# Altium PCB PCB1.PcbDoc
Units mil, origin at the board's own origin, x right, y up, seen from the top; angles counter-clockwise.
Board outline 3980 x 2430 mil, 2 copper layers (Top Layer, Bottom Layer); 78 components, 51 nets, 264 pads, 41 vias.
Unrouted connection lines stored in the file: 1.
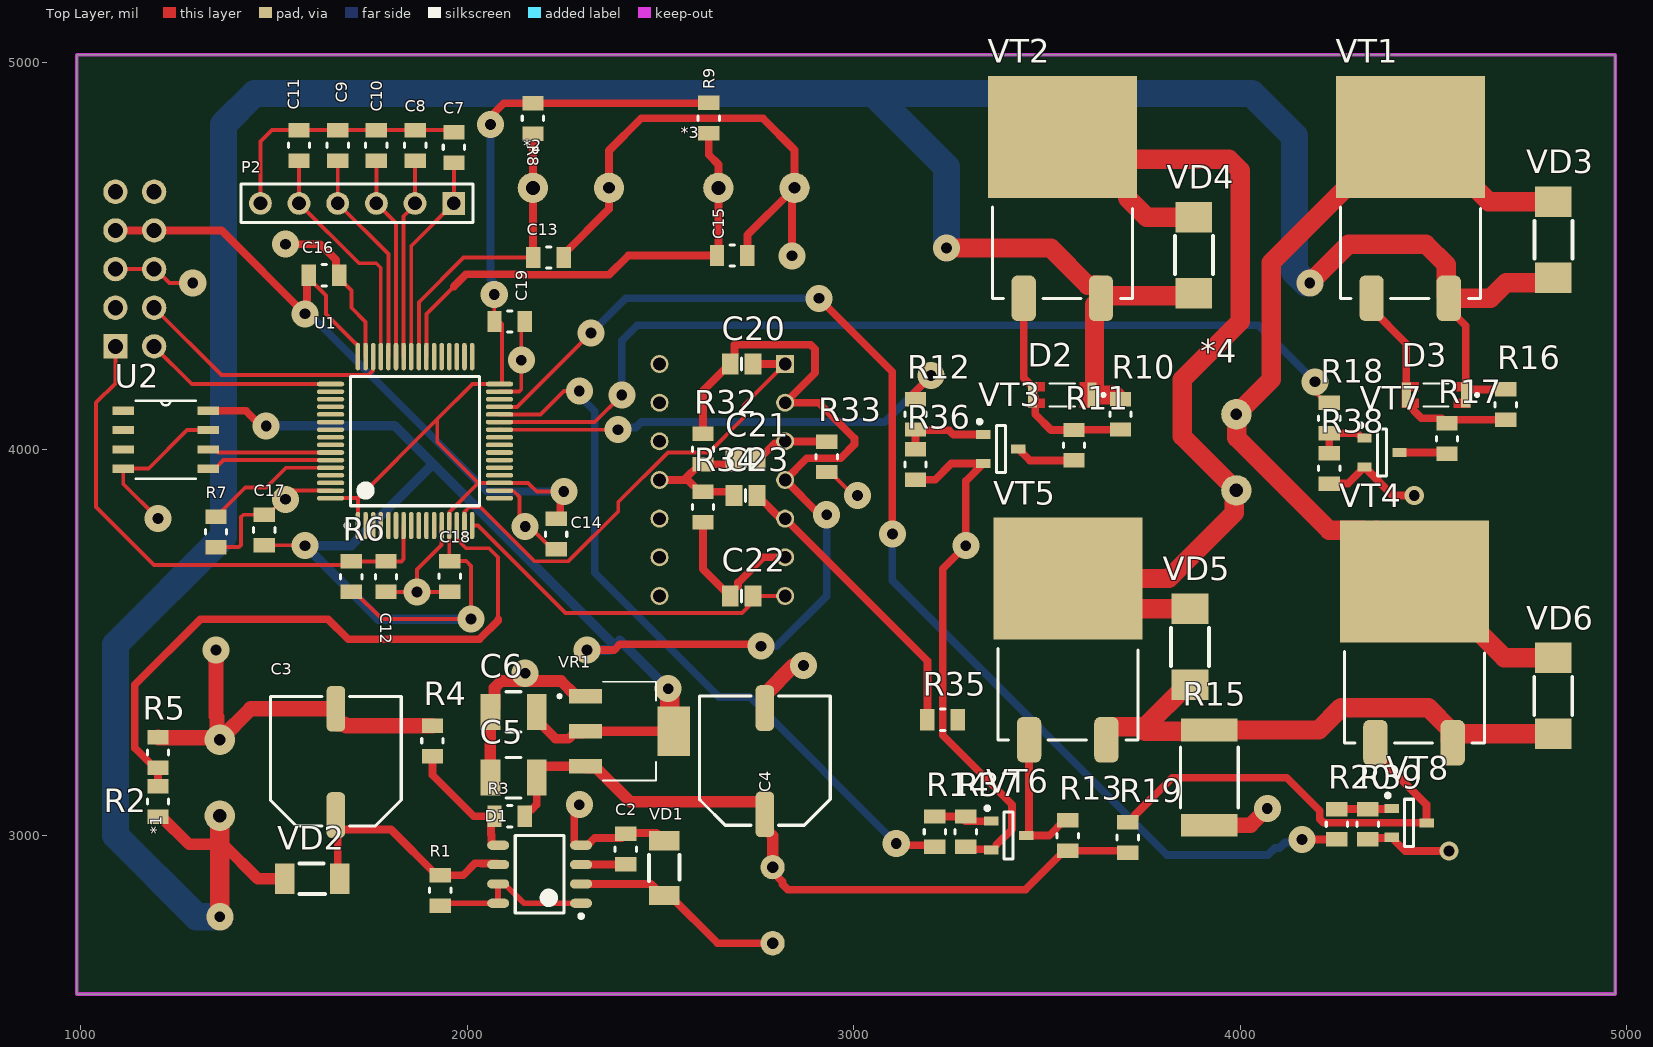
[diagram p0: Top Layer view]
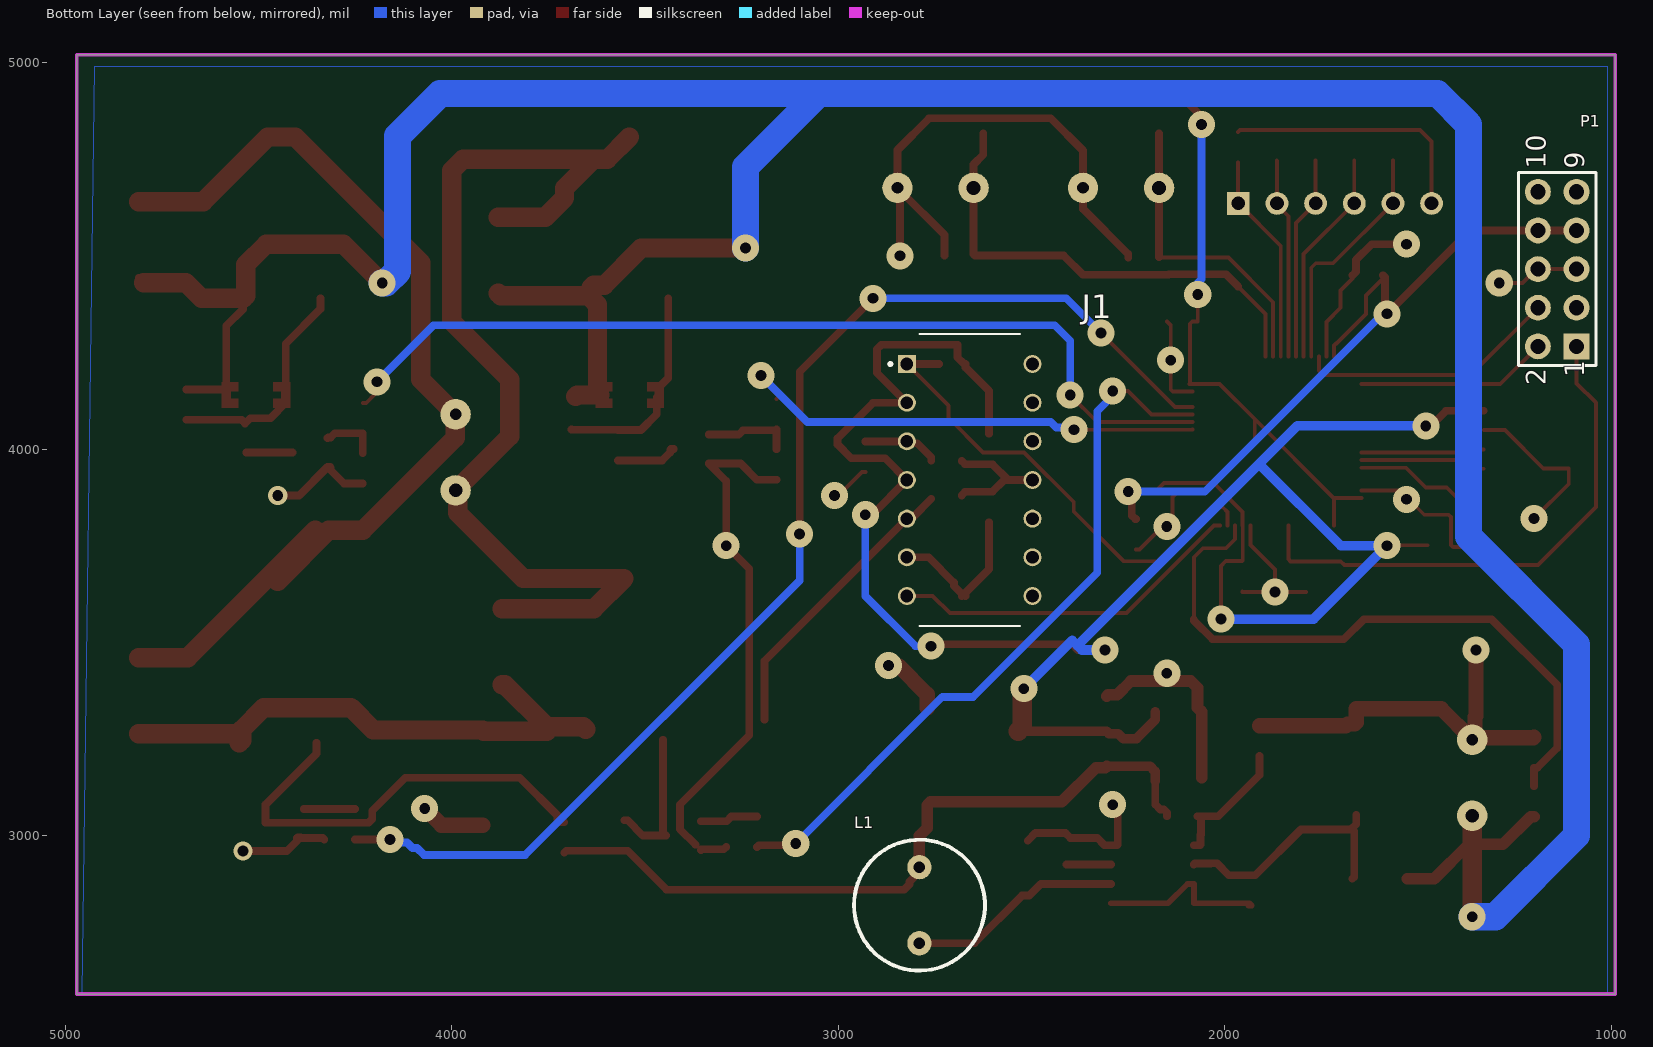
[diagram p1: Bottom Layer view, seen from below]
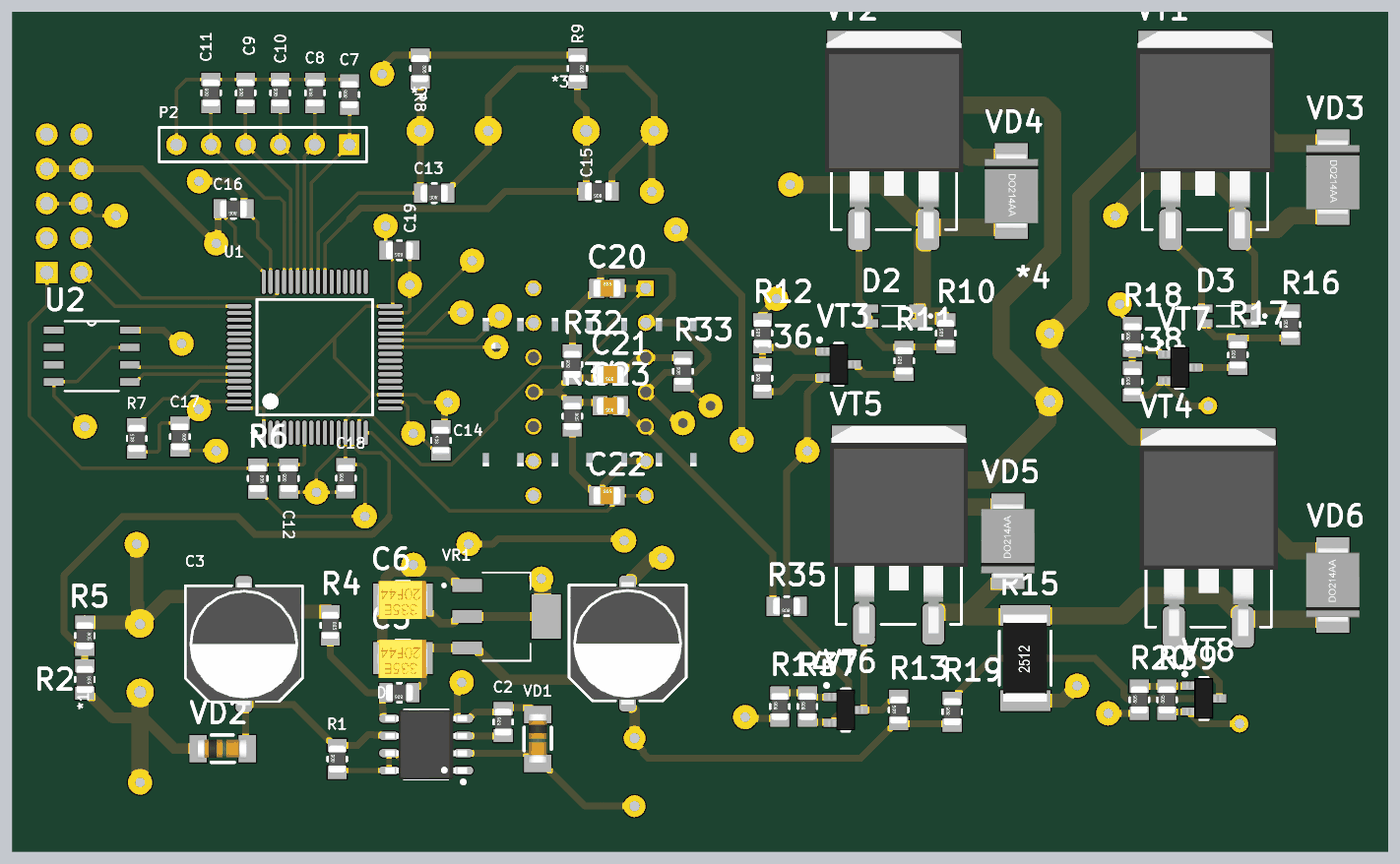
[diagram p2: 3D render of the assembled board from above, using the file's embedded part models]

## Layer stack, top to bottom
Top Solder: solder mask 0.4, Solder Resist, Dk 3.5
Top Layer: signal copper 1.4
Dielectric 1: dielectric 12.6, FR-4, Dk 4.8
Bottom Layer: signal copper 1.4
Bottom Solder: solder mask 0.4, Solder Resist, Dk 3.5

## Board outline
990,2590 990,5020 4970,5020 4970,2590

## Design rules (kind name [scope] priority, off if disabled: settings)
Clearance Clearance_1 [InPolygon] p1: gap=20 ignorepadtopadclearanceinfootprint=TRUE
Clearance [All] p2: gap=7 ignorepadtopadclearanceinfootprint=TRUE
PlaneClearance [All] p1: clearance=40
PolygonConnect [All] p1: connectstyle=Relief reliefconductorwidth=10 reliefentries=4 polygonreliefangle="90 Angle" airgapwidth=10
RoomDefinition MCU [InComponentClass('MCU')] p1: confinementstyle=ConfineIn formatcopy=TRUE lockcomponents=FALSE outline 1015,3425.63 3080.63,3425.63 3080.63,4975 1015,4975
RoomDefinition Power [InComponentClass('Power')] p2: confinementstyle=ConfineIn formatcopy=TRUE lockcomponents=FALSE outline 1115.67,2595 3200.04,2595 3200.04,3415 1115.67,3415
RoomDefinition MOTOR1 [InComponentClass('MOTOR1')] p3: confinementstyle=ConfineIn formatcopy=TRUE lockcomponents=FALSE outline 3134.68,2880 4950,2880 4950,4972.63 3134.68,4972.63
RoomDefinition Designator [InComponentClass('Designator')] p4: confinementstyle=ConfineIn formatcopy=TRUE lockcomponents=FALSE outline 3060,4350 2420,4350 2420,3547.56 3060,3547.56
RoutingVias [All] p1: holewidth=28 width=50 viastyle="Through Hole" minholewidth=28 minwidth=50 maxholewidth=28 maxwidth=50
SolderMaskExpansion [All] p1: expansion=4 istentingtop=FALSE
Width [All] p1 off: maxlimit=50 minlimit=10 preferedwidth=10 minimp=50.000000 maximp=50.000000 favimp=50.000000
29 further rules are at their usual default settings.

## Classes and differential pairs
component class MOTOR1: *4 D2 D3 R10 R11 R12 R13 R14 R15 R16 R17 R18 R19 R20 R36 R37 R38 R39 VD3 VD4 VD5 VD6 VT1 VT2 VT3 VT4 VT5 VT6 VT7 VT8
component class Designator: C20 C21 C22 C23 J1 R32 R33 R34 R35
component class Power: *1 C2 C3 C4 C5 C6 D1 L1 R1 R2 R3 R4 R5 VD1 VD2 VR1
component class MCU: *2 *3 C7 C8 C9 C10 C11 C12 C13 C14 C15 C16 C17 C18 C19 P1 P2 R6 R7 R8 R9 U1 U2

## Components (designator, comment, footprint, x,y, rotation, side; value= is the part's Value field where it differs from the comment)
*1 "Power connector 2pin" "Power connector 2 pin" 1360.04,3051.3 r180 top
*2 "Power connector 2pin" "Power connector 2 pin" 2170,4675.63 r90 top
*3 "Power connector 2pin" "Power connector 2 pin" 2650,4675.63 r90 top
*4 "Power connector 2pin" "Power connector 2 pin" 3990,3893.15 r180 top
C2 "Cap 0805" R0805 2410,2965 r90 top value={Value}
C3 "100 uF 50V" "Cap Alum 8x10.5 mm" 1660.04,3040.65 r90 top value={Value}
C4 "100 uF 50V" "Cap Alum 8x10.5 mm" 2770,3042.5 r90 top value={Value}
C5 "Cap tan_B" "Tantal type B" 2120,3150 r180 top value={Value}
C6 "Cap tan_B" "Tantal type B" 2120,3320 r180 top value={Value}
C7 "Cap 0805" R0805 1965.63,4780.63 r90 top value={Value}
C8 "Cap 0805" R0805 1865.63,4785.63 r90 top
C9 "Cap 0805" R0805 1665,4785.63 r90 top
C10 "Cap 0805" R0805 1765,4785.63 r90 top
C11 "Cap 0805" R0805 1565,4785.63 r90 top
C12 "Cap 0805" R0805 1790,3670 r90 top value={Value}
C13 "Cap 0805" R0805 2210.63,4495.63 r180 top value={Value}
C14 "Cap 0805" R0805 2230,3780 r90 top value={Value}
C15 "Cap 0805" R0805 2685.63,4500.63 r180 top value={Value}
C16 "Cap 0805" R0805 1630,4450 r180 top value={Value}
C17 "Cap 0805" R0805 1475,3790.63 r270 top value={Value}
C18 "Cap 0805" R0805 1955,3670.63 r90 top value={Value}
C19 "Cap 0805" R0805 2110,4330 r180 top value={Value}
C20 "Cap 0805" C0805 2710,4220 r0 top value={Value}
C21 "Cap 0805" C0805 2720,3970 r180 top value={Value}
C22 "Cap 0805" C0805 2710,3620 r0 top value={Value}
C23 "Cap 0805" C0805 2720,3880 r180 top value={Value}
D1 "MC34063" MC34063 2187.32,2900 r180 top
D2 "LL4148" DIO_LL4148 3539.68,4140 r180 top
D3 "LL4148" DIO_LL4148 4506.46,4140 r180 top
J1 "LM324N/NOPB" DIP825W47P254L1917H533Q14 2660,3920 r180 bottom
L1 "Coil 5mm TH" "Coil 5mm TH" 2790,2820 r270 bottom
P1 "SWD Header 5X2" HDR2X5 1140,4465.63 r90 bottom
P2 "Header 6" HDR1X6 1965,4635.63 r180 top
R1 "Res 0805" R0805 1930.04,2858.15 r90 top value={Value}
R2 "Res 0805" R0805 1200.04,3088.15 r270 top value={Value}
R3 "Res 0805" R0805 2110,3050 r180 top value={Value}
R4 "Res 0805" R0805 1910,3245 r270 top value={Value}
R5 "Res 0805" R0805 1200.04,3215 r270 top value={Value}
R6 "Res 0805" R0805 1700,3670 r270 top value={Value}
R7 "Res 0805" R0805 1350,3785.63 r90 top value={Value}
R8 "Res 0805" R0805 2170,4855.63 r270 top value={Value}
R9 "Res 0805" R0805 2625,4856.26 r270 top value={Value}
R10 "Res 0805" R0805 3690,4090 r90 top value={Value}
R11 "Res 0805" R0805 3569.68,4010 r90 top value={Value}
R12 "Res 0805" R0805 3160,4090 r90 top value={Value}
R13 "Res 0805" R0805 3553.68,3000 r90 top value={Value}
R14 "Res 0805" R0805 3210,3010 r90 top value={Value}
R15 "Res 2512" R2512 3920,3150 r90 top value={Value}
R16 "Res 0805" R0805 4686.69,4115 r90 top value={Value}
R17 "Res 0805" R0805 4534.69,4027 r90 top value={Value}
R18 "Res 0805" R0805 4230,4080 r90 top value={Value}
R19 "Res 0805" R0805 3708.68,2995 r90 top value={Value}
R20 "Res 0805" R0805 4250,3029.37 r90 top value={Value}
R32 "Res 0805" R0805 2610,4000 r90 top value={Value} (schematic designator R21)
R33 "Res 0805" R0805 2930,3980 r90 top value={Value} (schematic designator R22)
R34 "Res 0805" R0805 2610,3850 r270 top value={Value} (schematic designator R23)
R35 "Res 0805" R0805 3230,3300 r180 top value={Value} (schematic designator R24)
R36 "Res 0805" R0805 3160,3960 r90 top value={Value} (schematic designator R25)
R37 "Res 0805" R0805 3290,3010 r90 top value={Value} (schematic designator R26)
R38 "Res 0805" R0805 4230,3950 r90 top value={Value} (schematic designator R27)
R39 "Res 0805" R0805 4330,3029.37 r90 top value={Value} (schematic designator R28)
U1 "STM32F103RBT6" LQFP64_N 1865,4020.63 r90 top
U2 "M24C16-WMN6P" SOIC127P600X175-8N 1220,4024 r0 top
VD1 "1N4148" SOD-80 2509.99,2996.58 r270 top
VD2 "1N4148" SOD-80 1518.46,2888.14 r0 top
VD3 "CMR2U-01" SMB/DO-214AA 4829.69,4640 r270 top
VD4 "CMR2U-01" SMB/DO-214AA 3899.68,4600 r270 top
VD5 "CMR2U-01" SMB/DO-214AA 3850.32,3390 r90 top
VD6 "CMR2U-01" SMB/DO-214AA 4790,3263.15 r90 top
VR1 "LM1117MPX-3.3" VREG_LM1117MPX-3.3 2420,3270 r0 top
VT1 "IRF5210S" D2Pak 4239.69,4390 r0 top
VT2 "IRF5210S" D2Pak 3339.68,4390 r0 top
VT3 "2N7002" SOT-23 3380.68,4000 r180 top
VT4 "STB21NM60ND" D2Pak 4249.69,3240 r0 top
VT5 "STB21NM60ND" D2Pak 3353.68,3247.86 r0 top
VT6 "2N7002" SOT-23 3400.68,3000 r180 top
VT7 "2N7002" SOT-23 4366.69,3991 r180 top
VT8 "2N7002" SOT-23 4436.69,3033 r180 top

## Footprints (in the part's own frame and the unit in brackets; to place one, negate y for a bottom-side part, rotate by r counter-clockwise, add the part's x,y. Pads: shape width x height; smd on the part's side, far side on the other; paste and mask are expansions set on the pad)
C0805 [mm]
  rect 1.1x1.4 smd: 1(-0.75,0) 2(0.75,0)
  silkscreen extent 0,-0.4 0,0.4, body extent -1,-0.62 1,0.63, height 0.78
"Cap Alum 8x10.5 mm" [mm]
  rrect50% 3x1.2 smd: 1(0.318,0) 2(7.302,0)
  silkscreen extent -0.4,-4.3 8.1,4.3, body extent -0.69,-4.15 8.31,4.15, height 11.9
"Coil 5mm TH" [mm]
  round 1.6 / inner round 1.524 / far side round 1.6 hole 0.762: 1(-2.5,0) 2(2.5,0)
  silkscreen extent -4.3,-4.3 4.3,4.3
D2Pak [mm]
  rrect50% 1.6x3 smd: 1(2.54,0) 3(7.62,0)
  rrect0% 9.8x8 smd: 2(5.1,10.6)
  silkscreen extent 0.5,0 9.7,6, body extent 0.02,-0.7 10.18,14.56, height 4.98
DIO_LL4148 [mm]
  rect 0.6x1.65 smd: A(1.95,0) C(-1.95,0)
  Top Layer region: 2.25,-0.825 1.15,-0.825 1.15,-0.25 1.65,-0.25 1.65,0.25 1.15,0.25 1.15,0.825 2.25,0.825
  Top Layer region: -1.15,0.25 -1.65,0.25 -1.65,-0.25 -1.15,-0.25 -1.15,-0.825 -2.24,-0.825 -2.24,0.825 -1.15,0.825
  silkscreen extent -2.8,-0.75 0.83,0.75
DIP825W47P254L1917H533Q14 [mm]
  rect 1.18x1.18 hole 0.83: 1(-4.127,7.62)
  round 1.18 hole 0.83: 2(-4.127,5.08) 3(-4.127,2.54) 4(-4.127,0) 5(-4.127,-2.54) 6(-4.128,-5.08) 7(-4.128,-7.62) 8(4.127,-7.62) 9(4.127,-5.08) 10(4.127,-2.54) 11(4.127,0) 12(4.127,2.54) 13(4.128,5.08) 14(4.128,7.62)
  silkscreen extent -5.32,-9.59 3.3,9.59, body extent -9.65,-5.46 9.65,5.46, height 5.08
HDR1X6 [mm] "Connector; Header; 6 Position"
  rect 1.5x1.5 hole 0.9: 1(0,0)
  round 1.5 hole 0.9: 2(2.54,0) 3(5.08,0) 4(7.62,0) 5(10.16,0) 6(12.7,0)
  silkscreen extent -1.27,-1.27 13.97,1.27
HDR2X5 [mm] "Connector; Header; 5x2 Position"
  rect 1.7x1.7 / inner rect 1.5x1.5 / far side rect 1.6x1.6 hole 1: 1(-5.08,-1.27)
  round 1.7 / inner round 1.5 / far side round 1.6 hole 1: 2(-5.08,1.27) 3(-2.54,-1.27) 4(-2.54,1.27) 5(0,-1.27) 6(0,1.27) 7(2.54,-1.27) 8(2.54,1.27) 9(5.08,-1.27) 10(5.08,1.27)
  silkscreen extent -6.35,-2.54 6.35,2.54
LQFP64_N [mm] "Thin QFP, 64-Leads, Body 10x10mm, Pitch 0.5mm, IPC Medium Density"
  oval 1.8x0.3 smd: 1(-5.55,3.75) 2(-5.55,3.25) 3(-5.55,2.75) 4(-5.55,2.25) 5(-5.55,1.75) 6(-5.55,1.25) 7(-5.55,0.75) 8(-5.55,0.25) 9(-5.55,-0.25) 10(-5.55,-0.75) 11(-5.55,-1.25) 12(-5.55,-1.75) 13(-5.55,-2.25) 14(-5.55,-2.75) 15(-5.55,-3.25) 16(-5.55,-3.75) 33(5.55,-3.75) 34(5.55,-3.25) 35(5.55,-2.75) 36(5.55,-2.25) 37(5.55,-1.75) 38(5.55,-1.25) 39(5.55,-0.75) 40(5.55,-0.25) 41(5.55,0.25) 42(5.55,0.75) 43(5.55,1.25) 44(5.55,1.75) 45(5.55,2.25) 46(5.55,2.75) 47(5.55,3.25) 48(5.55,3.75)
  oval 0.3x1.8 smd: 17(-3.75,-5.55) 18(-3.25,-5.55) 19(-2.75,-5.55) 20(-2.25,-5.55) 21(-1.75,-5.55) 22(-1.25,-5.55) 23(-0.75,-5.55) 24(-0.25,-5.55) 25(0.25,-5.55) 26(0.75,-5.55) 27(1.25,-5.55) 28(1.75,-5.55) 29(2.25,-5.55) 30(2.75,-5.55) 31(3.25,-5.55) 32(3.75,-5.55) 49(3.75,5.55) 50(3.25,5.55) 51(2.75,5.55) 52(2.25,5.55) 53(1.75,5.55) 54(1.25,5.55) 55(0.75,5.55) 56(0.25,5.55) 57(-0.25,5.55) 58(-0.75,5.55) 59(-1.25,5.55) 60(-1.75,5.55) 61(-2.25,5.55) 62(-2.75,5.55) 63(-3.25,5.55) 64(-3.75,5.55)
  silkscreen extent -5.67,-4.25 4.25,4.57, body extent -5,-5 5,5, height 1.6
MC34063 [mm] "MC34063 SO-8"
  oval 1.45x0.6 smd: 1(-2.725,1.905) 2(-2.725,0.635) 3(-2.725,-0.635) 4(-2.725,-1.905) 5(2.725,-1.905) 6(2.725,-0.635) 7(2.725,0.635) 8(2.725,1.905)
  silkscreen extent -2.85,-2.55 1.6,2.88, body extent -3,-2.55 3,2.55, height 1.75
"Power connector 2 pin" [mm]
  round 2 hole 0.9: 1(0,0)
  round 2 hole 0.762: 2(0,-5)
R0805 [mm]
  rect 0.95x1.4 smd: 1(-1,0) 2(1,0)
  silkscreen extent -0.15,-0.7 0.15,0.7, body extent -1,-0.62 1,0.63, height 0.78
R2512 [mm]
  rect 1.5x3.7 smd: 1(-3.125,0) 2(3.125,0)
  silkscreen extent -2,-1.9 2,1.9, body extent -3.2,-1.6 3.2,1.6, height 0.6
SMB/DO-214AA [mm]
  rect 2x2.4 smd: 1(0,-0.5) 2(5,-0.5)
  silkscreen extent 1.25,-1.75 3.75,0.75, body extent -0.29,-2.47 5.29,1.48, height 2.65
SOD-80 [mm]
  rect 1.27x2 smd: 1(0.25,0) 2(3.85,0)
  silkscreen extent 1.2,-1 2.9,1, body extent 0.2,-0.75 3.8,0.75, height 1.5
SOIC127P600X175-8N [mil]
  rect 56x21 smd: 1(-110,75) 2(-110,25) 3(-110,-25) 4(-110,-75) 5(110,-75) 6(110,-25) 7(110,25) 8(110,75)
  silkscreen extent -78,-101 78,101
SOT-23 [mm]
  rect 0.95x0.6 smd: 1(1.15,-0.95) 2(1.15,0.95) 3(-1.15,0)
  silkscreen extent -0.3,-1.92 1.52,1.55, body extent -1.27,-1.5 1.27,1.5, height 1.1
"Tantal type B" [mm]
  rect 1.3x2.35 smd: 1(-1.525,0) 2(1.525,0)
  silkscreen extent -0.5,-1.33 0.5,1.33, body extent -1.81,-1.35 1.86,1.45, height 1.9
VREG_LM1117MPX-3.3 [mm]
  rect 2.15x0.95 smd: 1(-2.9,2.3) 2(-2.9,0) 3(-2.9,-2.3)
  rect 2.15x3.25 smd: 4(2.9,0)
  silkscreen extent -4.7,-3.25 1.75,3.25

## Part data
C2 C7 C8 C9 C10 C11 C12 C13 C14 C15 C16 C17 C18 C19 C20 C21 C22 C23: "Конденсатор 0805", Manufacturer=Murata, Model=0805, sm_pins=2, th_pins=0
C3 C4: library part "Cap Alum", "SMT 8 x 10.5 мм", Manufacturer=Epcos
C5 C6: "type B", Manufacturer=AVX
D2 D3: "Diode Standard 100V 200mA Surface Mount SOD-80", Package="SOD-80 Taitron", Availability=Unavailable, MF="ON Semiconductor", MP=LL4148, Price=None, SnapEDA_Link=https://www.snapeda.com/parts/LL4148/ON%20Semiconductor/view-part/2182678/?ref=snap
J1: "4-Channel industry standard operational amplifier 14-PDIP 0 to 70", Package="PDIP-14 Texas Instruments", Availability=Good, Check_prices=https://www.snapeda.com/parts/LM324N/Texas%20Instruments/view-part/295/?ref=eda, MF="Texas Instruments", MP=LM324N, Price=None, Purchase-URL=https://pricing.snapeda.com/search/part/LM324N/?ref=eda, SnapEDA_Link=https://www.snapeda.com/parts/LM324N/Texas%20Instruments/view-part/295/?ref=snap
P1: "Header, 5-Pin, Dual row", LatestRevisionDate=17-Jul-2002, LatestRevisionNote="Re-released for DXP Platform.", Publisher="Altium Limited"
P2: "Header, 6-Pin", LatestRevisionDate=17-Jul-2002, LatestRevisionNote="Re-released for DXP Platform.", Publisher="Altium Limited"
R1 R2 R3 R4 R5 R6 R7 R8 R9 R10 R11 R12 R13 R14 R16 R17 R18 R19 R20 R32 R33 R34 R35 R36 R37 R38 R39: "Резистор 0805", Manufacturer=Yageo, sm_pins=2, th_pins=0
R15: "Резистор 2512", Manufacturer=Yageo, Model=2512, sm_pins=2, th_pins=0
U1: "STM32 ARM-based 32-bit MCU with 128 Kbytes Flash, 64-pin LQFP, Industrial Temperature", ComponentLink1Description="Manufacturer Link", ComponentLink1URL=www.st.com/stm32, ComponentLink2Description=Datasheet, ComponentLink2URL=http://www.st.com/stonline/products/literature/ds/13587.pdf, DatasheetVersion="rev6, Mar-2008", PackageDescription="64-Pin Low-Profile Quad Flat Pack, 10 x 10 mm Body, 0.5 mm Pitch (LQFP64)", PackageReference=LQFP64, PackageVersion=Mar-2008, Published=30-May-2008, Publisher="Altium Limited"
U2: "EEPROM Memory IC 16Kb _2K x 8_ IÂ²C 400kHz 900ns 8-SO", Package="SO-8 STMicroelectronics", Availability=Unavailable, MF=STMicroelectronics, MP=M24C16-WMN6P, Price=None, SnapEDA_Link=https://www.snapeda.com/parts/M24C16-WMN6P/STMicroelectronics/view-part/42148/?ref=snap
VD1 VD2: "4 ns, 100V, 150 mA", Manufacturer=NXP, Model=1N4148
VD3 VD4 VD5 VD6: "Ultrafast, 100V, 2A, 50 ns", Manufacturer="Central Semiconductor Corp", Model=CMR2U-01
VR1: "800-mA 15-V linear voltage regulator 4-SOT-223", Package="SOT-223-4 Texas Instruments", Availability=Warning, Check_prices=https://www.snapeda.com/parts/LM1117MPX-3.3/Texas%20Instruments/view-part/78946/?ref=eda, MF="Texas Instruments", Mouser-Purchase-URL=https://snapeda.com/shop?store=Mouser&id=78946, MP=LM1117MPX-3.3, Price=None, SnapEDA_Link=https://www.snapeda.com/parts/LM1117MPX-3.3/Texas%20Instruments/view-part/78946/?ref=snap, Texas_Instruments-Purchase-URL=https://snapeda.com/shop?store=Texas+Instruments&id=78946
VT1 VT2: "P-chanel, 100V, 40A, 60 mOhm", Manufacturer="International Rectifier", Model=IRF5210SPBF
VT3 VT6 VT7 VT8: "60V, 200 mA, N-chanel", Manufacturer="ON Semiconductor", Model=2N7002LT1G, sm_pins=3, th_pins=0
VT4 VT5: "D2pak, 600V, 17А, 170 mOhm", Manufacturer="ST Microelectronics", Model=STB21NM60ND

## Via types
v1: diameter 70, hole 28, Top Layer to Bottom Layer, 39 vias
v2: diameter 50, hole 28, Top Layer to Bottom Layer, 2 vias

## Nets (pads, with @x,y where several pads share a name; then routed paths per layer and width w, separated by ;. In a path a pad name is that pad's centre, name@x,y a point inside that pad or via, vN(x,y) a via of type N, cw(c..) or ccw(c..) an arc to the next point about the centre after c; other vN are vias at no path point)
BUTTON_1: C7.1 P2.1 U1.41 | length 547.9
  Top Layer w10: U1.41 1855.16,4525.79 P2.1 1965.63,4636.26 C7.1
BUTTON_2: C8.1 P2.2 U1.42 | length 519.6
  Top Layer w10: U1.42 1835.47,4602.19 1865,4631.71 P2.2 1865,4745.63 C8.1
BUTTON_3: C10.1 P2.3 U1.43 | length 528.2
  Top Layer w10: C10.1 P2.3 1815.79,4584.84 U1.43
BUTTON_4: C9.1 P2.4 U1.44 | length 561.4
  Top Layer w10: C9.1 P2.4 1796.1,4504.53 U1.44
BUTTON_5: C11.1 P2.5 U1.45 | length 620.9
  Top Layer w10: C11.1 P2.5 1720,4480.63 1764.77,4480.63 1776.42,4468.98 U1.45
EEPROM_SCL: U1.58 U2.6 | length 319.8
  Top Layer w10: U2.6 1347.5,3999 1355.4,3991.1 U1.58
EEPROM_SDA: U1.59 U2.5 | length 325.8
  Top Layer w10: U2.5 1347.5,3949 1369.92,3971.42 U1.59
GND: *1.2 *2.2 *3.2 C2.2 C3.2 C4.2 C5.2 C6.2 C7.2 C8.2 C9.2 C10.2 C11.2 C12.1 C13.1 C14.1 C15.1 C16.1 C17.1 C18.1 C19.1 C21.2 C23.2 D1.4 J1.11 P1.5 P1.6 P2.6 R4.1 R5.1 R7.1 R15.1 R32.1 R34.1 R36.1 R37.1 R38.1 R39.1 U1.12 U1.18 U1.31 U1.47 U1.63 U2.4 U2.7 VD1.1 VR1.1 VT3.2 VT6.2 VT7.2 VT8.2 | length 8815.1
  Top Layer w10: P1.5 P1.6 1194.37,4465.63 1230,4430 v1(1290,4430) ; v1(1200,3820) 1110,3910 U2.4 1111,3950 1176,3950 1275,4049 U2.7 ; R7.1@1327.44,3732.56 1341.14,3746.26 R7.1 1409.14,3746.26 1415,3752.12 1415,3824.14 1420.86,3830 C17.1 1483.86,3830 1546.54,3892.68 U1.63 ; P2.6 1465.63,4636.26 1465.63,4795.63 1495,4825 C11.2 C9.2 C10.2 C8.2 1960.63,4825 C7.2 ; C16.1 1669.37,4441.14 1700.51,4410 1700.51,4365.72 1737.05,4329.19 U1.47 ; C12.1 1790.63,3630 v1(1870,3630) ; U1.12 1933.55,3801.78 1933.55,3751.78 1870,3688.23 v1(1870,3630) ; C18.1 1953.74,3630 v1(1870,3630) ; U1.18 2113.52,3892.68 2115.3,3890.9 2120.45,3890.9 2134.97,3876.38 2134.97,3826.8 2221.14,3740.63 C14.1 ; U1.31 2083.85,4148.93 2134.14,4148.93 2140,4154.79 v1(2140,4230) 2140,4320.63 C19.1
  Top Layer w20: v1(1530,4530) 1620,4530 1660.67,4489.33 1660.67,4458.7 C16.1 ; C13.1 2250,4504.49 2366.77,4621.26 2366.77,4675.55 *2.2 2366.85,4772.48 2450,4855.63 2765,4855.63 2846.85,4773.78 *3.2 *3.2@2840,4668.78 ; v1(2290,3080) 2290,3076.47 2277.18,3063.65 2277.18,2976.44 2278.62,2975 D1.4 2311.34,2975 2330.3,2993.96 2399.59,2993.96 C2.2 2412.36,3006.73 2490,3006.73 VD1.1 ; J1.11 2560.51,3920 ; C23.2@2680.63,3880 2680.63,3880.67 2671.93,3889.37 R34.1 2601.14,3889.37 2570.51,3920 2560.51,3920 ; C21.2@2680.63,3970 2680.63,3969.33 2671.93,3960.63 R32.1 2601.14,3960.63 2560.51,3920 ; C15.1 2725,4553.78 *3.2@2840,4668.78 ; v1(2840,4500) *3.2@2840,4668.78 ; R36.1 3210.63,3920.63 3252.6,3962.6 VT3.2 3290,3917.19 v1(3290,3750) 3230,3690 3230,3259.68 3409.68,3080 3409.68,3016.87 3369.11,2976.3 ; R37.1 3296.22,2964.41 3353.6,2964.41 VT6.2 ; R38.1 4278.44,3910.63 4312.71,3944.9 4312.71,3951.79 4314.52,3953.6 VT7.2 4395.01,3880 v2(4450,3880) ; R39.1 4333.79,2993.79 4389.6,2993.79 VT8.2 4398.3,2995.6 4400.11,2993.79 4400.11,2986.9 4427.01,2960 v2(4540,2960)
  Top Layer w30: C5.2 C6.2 2070.55,3330.59 2070.55,3382.43 2088.12,3400 2150,3400 2242.76,3400 2278.5,3364.25 2302.13,3364.25 VR1.1
  Top Layer w39.37: R5.1 1201.02,3253.39 *1.2@1354.8,3253.39 ; v1(1350,3480) 1350,3309.63 1352.51,3307.13 1352.51,3255.68 *1.2@1354.8,3253.39 ; R4.1 1687.04,3284.37 1682.63,3288.78 1663.98,3288.78 1660.04,3292.72 C3.2 1440.04,3328.15 *1.2 *1.2@1354.8,3253.39 ; C4.2 2770,3365.43 2844.57,3440 v1(2870,3440) ; R15.1 4026.97,3026.97 v1(4070,3070)
  other v1: 2150,3420 2150,3800 1530,3870
Net*2_1: *2.1 C13.2 R8.2 U1.40 | length 806.2
  Top Layer w10: U1.40 1874.84,4379.84 1990.63,4495.63 C13.2 C13.2@2170,4496.89
  Top Layer w20: C13.2@2170,4496.89 *2.1 R8.2
Net*3_1: *3.1 C15.2 R9.2 U1.39 | length 1253.6
  Top Layer w10: U1.39 1894.53,4349.53 1965.63,4420.63
  Top Layer w20: 1965.63,4420.63 1997,4452 2144.59,4452 2145.52,4451.07 2366.76,4451.07 2416.32,4500.63 C15.2 2650,4504.37 *3.1 2650,4736.21 2625,4761.21 R9.2
Net*4_1: *4.1 VD4.1 VD5.2 VT2.2 VT5.2 | length 2671.4
  Top Layer w50: VT2.2 3597.8,4750 VT2.2@3633.23,4750 ; VD5.2 3632.8,3586.85 VT5.2 3815.18,3665.18 3984.5,3834.5 3984.5,3898.65 3850,4033.15 3850,4180 4000,4330 4000,4720.71 3970.71,4750 VT2.2@3633.23,4750 ; VD4.1 3757.76,4600 3708.39,4649.37 3708.39,4674.84 VT2.2@3633.23,4750
Net*4_2: *4.2 VD3.1 VD6.2 VT1.2 VT4.2 | length 2631.2
  Top Layer w50: VT4.2@4353.43,3789.8 4683.23,3460 VD6.2 ; VT4.2 4317.99,3789.8 4230.2,3789.8 3990.87,4029.13 3990.87,4089.13 *4.2 4080,4180 4080,4482.28 4405.04,4807.32 VT1.2 4475.91,4807.32 4643.23,4640 VD3.1
NetC2_1: C2.1 D1.3 | length 115.7
  Top Layer w10: C2.1@2409.37,2925 C2.1
  Top Layer w20: D1.3 C2.1@2409.37,2925
NetC3_1: C3.1 D1.6 R1.2 VD2.2 | length 653.1
  Top Layer w20: C3.1 1660.04,3029.39 1673.52,3015.91 1802.8,3015.91 R1.2@1921.18,2897.52 ; VD2.2 1665.04,2893.15 1665.04,3010.91 C3.1@1670.04,3015.91 ; R1.2 R1.2@1921.18,2897.52 ; D1.6 2077.43,2927.61 2037.01,2927.61 2036.47,2928.15 2020.04,2928.15 1989.41,2897.52 R1.2@1921.18,2897.52
NetC20_2: C20.2 J1.1 U1.15 | length 1254.9
  Top Layer w10: U1.15 1993.3,3802.47 1993.3,3837.64 2005.22,3849.56 2033.97,3849.56 2173.6,3709.93 2262.53,3709.93 2390.77,3838.17 2390.77,3863.09 2519.01,3991.33 2625.19,3991.33 2714.73,4080.87 2714.73,4112.23 J1.1
  Top Layer w20: C20.2 J1.1
NetC21_1: C21.1 J1.3 R33.2 | length 194.9
  Top Layer w20: C21.1@2759.37,3970 2759.37,3978.86 2795.45,4014.94 2822.5,4014.94 J1.3 ; J1.3@2827.25,4019.68 2929.69,4019.68 R33.2
NetC22_1: C22.1 J1.6 R34.2 | length 407.5
  Top Layer w20: R34.2 2610,3689.49 2670.63,3628.86 2670.63,3625.91 C22.1@2670.63,3620 ; C22.1 2680.47,3625.91 2700.87,3646.31 2700.87,3654.6 2766.27,3720 J1.6
NetC22_2: C22.2 J1.7 U1.16 | length 922.2
  Top Layer w10: U1.16 2027.87,3802.13 2066.44,3763.56 2254.56,3575.44 2711.28,3575.44 2755.84,3620 J1.7
NetC23_1: C23.1 J1.5 R35.2 | length 748.4
  Top Layer w20: C23.1@2759.37,3871.14 2805.45,3825.06 2817.44,3825.06 J1.5 ; J1.5@2830.39,3814.85 2830.39,3812.11 3190.63,3451.87 R35.2
NetD1_1: D1.1 D1.7 D1.8 R1.1 | length 446.7
  Top Layer w15: R1.1@1938.9,2818.78 R1.1 1936.26,2825 D1.8 D1.7 2096.77,2875 2146.77,2825 D1.1
NetD1_2: D1.2 L1.2 VD1.2 | length 558.9
  Top Layer w20: D1.2 2475.63,2875 2505.63,2845 2524.37,2845 2647.8,2721.57 L1.2
NetD1_5: D1.5 R3.2 R4.2 | length 345.5
  Top Layer w20: R4.2 1910,3156.93 2016.93,3050 R3.2@2061.52,3050 ; R3.2 R3.2@2061.52,3050 ; D1.5 2064.29,2975 2062.61,2976.67 2062.61,3001.34 2061.52,3002.44 R3.2@2061.52,3050
NetD2_A: D2.A R10.1 R11.2 VT2.1 | length 550.1
  Top Layer w20: VT2.1 3439.68,4183.9 3462.91,4160.67 D2.A 3469.68,4133.23 3469.68,4090 3510.31,4049.37 R11.2 3570.31,4050 3689.37,4050 R10.1
NetD3_A: D3.A R16.1 R17.2 VT1.1 | length 590.7
  Top Layer w20: VT1.1 4339.69,4362.44 4429.69,4272.44 4429.69,4119.33 4468.94,4080.07 4520.98,4080.07 R17.2 4543.94,4075.63 R16.1
NetR2_1: R2.1 R5.2 U1.14 | length 1669.5
  Top Layer w10: U1.14 1973.61,3801.78 1973.61,3766.61 1996.92,3743.31 2056.69,3743.31 2080,3720 2080,3560
  Top Layer w20: R2.1 R5.2 1191.18,3175.63 1140,3226.81 1140,3390 1310,3560 1640,3560 1692,3508 2031.54,3508 2080,3556.46 2080,3560
NetR7_2: R7.2 U1.60 | length 349
  Top Layer w10: R7.2 1425.63,3900.63 1480,3900.63 1531.1,3951.73 U1.60
NetR11_1: R11.1 VT3.3 | length 159.9
  Top Layer w20: VT3.3 3432.85,4000 3434.66,3998.19 3434.66,3991.3 3455.33,3970.63 R11.1
NetR12_1: R12.1 R36.2 VT3.1 | length 234.4
  Top Layer w10: R12.1 3161.61,4049.02 R12.1@3163.23,4047.4
  Top Layer w20: R36.2 R12.1 ; R12.1@3161.61,4049.02 3246.33,4049.02 3257.94,4037.4 VT3.1
NetR12_2: R12.2 U1.26 | length 1259.7
  Top Layer w10: U1.26 2083.58,4050.08 v1(2389.92,4050.08) ; R12.2@3150.32,4139.06 R12.2
  Top Layer w20: R12.2@3150.32,4139.06 3200,4188.74 v1(3200,4190)
  Bottom Layer w20: v1(2389.92,4050.08) 2395.69,4055.85 2436.07,4055.85 2450.23,4070 3080,4070 v1(3200,4190)
NetR13_2: R13.2 VT5.1 VT6.3 | length 374.7
  Top Layer w20: VT6.3 VT6.3@3446.87,3000 ; VT5.1 3453.68,3006.81 VT6.3@3446.87,3000 ; R13.2 3544.83,3039.37 3505.46,3000 VT6.3@3446.87,3000
NetR14_1: R14.1 U1.28 | length 1891.9
  Top Layer w10: U1.28 2189.53,4089.53 2250,4150 v1(2290,4150)
  Top Layer w20: v1(3110,2979.37) 3114.37,2975 3205.63,2975 R14.1
  Bottom Layer w20: v1(2290,4150) 2290,4138.08 2330,4098.08 2330,3680 2651.14,3358.86 2730.51,3358.86 v1(3110,2979.37)
NetR14_2: R14.2 R37.2 VT6.1 | length 150.4
  Top Layer w20: R14.2 3276.8,3049.37 3288.77,3037.4 VT6.1
NetR15_2: R15.2 VD5.1 VD6.1 VT4.3 VT5.3 | length 1391.3
  Top Layer w50: VT5.3@3653.68,3275.42 3660.18,3281.91 3754.04,3281.91 3862.13,3390 VD5.1 ; 3754.04,3270 3916.97,3270 R15.2 ; R15.2@3930,3273.03 4203,3273.03 4261.02,3331.06 4486.19,3331.06 4543.19,3274.06 4543.19,3246.5 VT4.3 ; VT4.3@4549.69,3256.65 4556.18,3263.15 VD6.1
NetR17_1: R17.1 VT7.3 | length 124.1
  Top Layer w10: R17.1@4531.31,3991 R17.1
  Top Layer w20: VT7.3 R17.1@4531.31,3991
NetR18_1: R18.1 R38.2 VT7.1 | length 147.7
  Top Layer w20: R38.2 R18.1 4302.29,4040.63 4312.71,4030.21 4319.6,4030.21 VT7.1
NetR18_2: R18.2 U1.27 | length 2430.9
  Top Layer w10: U1.27 2329.84,4069.84 v1(2400,4140) ; v1(4193.31,4174) 4197.12,4170.19 4197.12,4143.39 4221.14,4119.37 R18.2
  Bottom Layer w20: v1(2400,4140) 2400,4280 2440,4320 4047.32,4320 v1(4193.31,4174)
NetR19_2: R19.2 VT4.1 VT8.3 | length 1149.2
  Top Layer w20: R19.2 3717.54,3034.37 3726.24,3043.07 3726.24,3051.93 3824.31,3150 4120,3150 4205.44,3064.56 4205.44,3043 4215.4,3033.04 4236.96,3033.04 4237,3033 VT8.3 4481.96,3080.17 4349.69,3212.44 VT4.1
NetR20_1: R20.1 U1.29 | length 3212.2
  Top Layer w10: U1.29 2129.21,4109.21 v1(2320,4300)
  Top Layer w20: v1(2910,4390) 3100,4200 v1(3100,3780) ; v1(4160,2990) R20.1
  Bottom Layer w20: v1(2320,4300) 2410,4390 v1(2910,4390) ; v1(3100,3780) 3100,3660 3810,2950 4071.88,2950 4089.88,2968 4101.54,2968 4115.81,2982.27 4152.27,2982.27 v1(4160,2990)
NetR20_2: R20.2 R39.2 VT8.1 | length 186.6
  Top Layer w20: R20.2 R39.2 ; R39.2 4382.71,3068.74 4382.71,3069.57 4330.83,3069.57 R39.2
NetR33_1: R33.1 | length 105.1
  Top Layer w10: R33.1 2938.86,3940.63 2999.49,3880 v1(3010,3880)
NetR35_1: R35.1
NetU1_20: U1.20
NetU1_21: U1.21
NetU1_22: U1.22
NetU1_23: U1.23
RST: C12.2 P1.1 R6.1 U1.7 | length 1387.2
  Top Layer w10: P1.1 1090,4170 1040,4120 1040,3850 1190,3700 1690.63,3700 R6.1 C12.2 1829.61,3709.37 1835.47,3715.23 U1.7
SWCLK: P1.2 U1.49 | length 496.8
  Top Layer w10: P1.2 1287.36,4168.27 U1.49
SWDIO: P1.4 U1.46 | length 679
  Top Layer w10: P1.4 1363.93,4191.7 1744.46,4191.7 1756.39,4203.62 1756.39,4238.79 U1.46
VCC_36V: *1.1 D2.C D3.C R2.2 R10.2 R16.2 VD2.1 VD3.2 VD4.2 VT1.3 VT2.3 | length 8996.1
  Top Layer w0: R10.2@3679.16,4131.35 3688.02,4131.35 R10.2
  Top Layer w20: R10.2@3679.16,4131.35 R10.2@3679.16,4136.07 ; VT1.3 4539.69,4362.44 4583.23,4318.9 D3.C@4583.23,4147.56 ; D3.C D3.C@4583.23,4147.56 ; R16.2 4590.04,4154.37 D3.C@4583.23,4147.56 ; VD3.2@4797.03,4430.18 VD3.2
  Top Layer w30: R2.2 1208.9,3048.78 1280.58,2977.09 1360,2977.09 ; *1.1 1369.37,3041.97 1369.37,2977.09 1458.31,2888.15 VD2.1
  Top Layer w50: v1(1360,2790) 1360,2977.09 *1.1 *1.1 ; v1(3240,4520) 3509.68,4520 3605.63,4424.06 3633.19,4424.06 3639.68,4417.56 VT2.3@3639.68,4390.08 ; R10.2@3679.16,4136.07 3675.23,4140 D2.C 3622.7,4146.24 3622.7,4373.01 VT2.3 VT2.3@3639.68,4390.08 ; VD4.2 3873.43,4396.57 3646.18,4396.57 VT2.3@3639.68,4390.08 ; v1(4180,4430) 4280,4530 4480,4530 4533.19,4476.81 4533.19,4396.5 VT1.3 4647.58,4390 4687.76,4430.18 VD3.2@4797.03,4430.18
  Bottom Layer w70: v1(1360,2790) 1300,2790 1090,3000 1090,3494.29 1370,3774.29 1370,4840 1450,4920 3050,4920 ; v1(3240,4520) 3240,4730 3050,4920 ; v1(4180,4430) 4170,4430 4140,4460 4140,4810 4030,4920 3050,4920
VDD_3_3V: C6.1 C14.2 C16.2 C17.2 C18.2 C19.2 C20.1 J1.2 J1.4 P1.7 P1.8 R6.2 R8.1 R9.1 R32.2 U1.1 U1.13 U1.19 U1.32 U1.48 U1.64 U2.8 VR1.2 VR1.4 | length 10294
  Top Layer w10: C17.2 v1@1580,3751.26 ; C16.2 1590.63,4441.14 1634.33,4397.44 1634.33,4349.2 1710.53,4273 1712.53,4273 1717.36,4268.17 U1.48 ; U1.64 1716.73,3872.99 1717.36,3872.36 ; R6.2 1708.86,3630.63 1779.49,3560 v1(2010,3560) 2010,3697.56 1997.56,3710 C18.2 1953.58,3711.42 U1.13 1953.93,3802.47 1953.93,3837.64 2028.65,3912.36 ; U1.1 1717.36,3872.36 ; v1(2070,4400) 2070,4330.63 C19.2 2084.33,4330 2090.19,4324.14 2090.19,4169.1 2091.03,4168.27 U1.32 2013.27,4168.27 1922.5,4077.5 ; v1(2250,3890) 2180,3890 2157.64,3912.36 U1.19 2028.65,3912.36 ; R9.1@2624.37,4895 R9.1 ; 1717.36,3872.36 1922.5,4077.5 ; 1922.5,4077.5 1922.5,4018.52 2028.65,3912.36
  Top Layer w20: P1.7 P1.8 1364.37,4565.63 v1(1580,4350) 1585.32,4355.31 1585.32,4444.69 C16.2 ; U2.8 1427.47,4099 1466.47,4060 v1(1480,4060) ; v1(2060,4840) 2060,4860 2095,4895 R8.1 R9.1@2624.37,4895 ; C14.2 2231.73,3819.37 2240.43,3828.07 2240.43,3880.43 v1(2250,3890) ; v1(2310,3480) 2380,3480 2395,3495 2755,3495 v1(2760,3490) ; R32.2 2610,4150.51 2670.63,4211.14 2670.63,4220 2674.16,4220 2691.72,4237.56 2691.72,4270 2888.28,4270 2900,4258.28 2900,4197.5 J1.2 2910,4120 3001.72,4028.28 3001.72,4011.72 2966.33,3976.33 2878.83,3976.33 J1.4 2912.5,3830 v1(2930,3830)
  Top Layer w25: C6.1 2180.04,3299.33 2228.49,3250.88 2263.09,3250.88 2276,3263.8 2299.63,3263.8 VR1.2 VR1.4
  Top Layer w50: v1(2520,3380) 2523.83,3376.17 2523.83,3280.35 VR1.4
  Bottom Layer w20: v1(1580,4350) 1591.72,4350 2051.72,3890 v1(2250,3890) ; v1(2060,4840) 2060,4440 2070,4430 v1(2070,4400) ; v1(2760,3490) 2800,3490 2930,3620 v1(2930,3830)
  Bottom Layer w25: v1(1480,4060) 1812.93,4060 1911.46,3961.46 ; v1(2010,3560) 1770,3560 v1(1580,3750) 1700,3750 1911.46,3961.46 ; v1(2310,3480) 2370,3480 2381.46,3491.46 ; v1(2520,3380) 2395,3505 2381.46,3491.46 ; 1911.46,3961.46 2381.46,3491.46
VDD_12V: C4.1 C5.1 L1.1 R3.1 R13.1 R19.1 VR1.3 | length 1982.1
  Top Layer w0: C5.1@2180.04,3140.69 C5.1
  Top Layer w20: R3.1 2149.37,3058.86 2158.07,3067.56 2166.93,3067.56 2180.04,3080.67 C5.1@2180.04,3140.69 ; L1.1 2790,2906.79 2815.86,2880.93 2815.86,2874.14 2830,2860 3444.2,2860 3544.83,2960.63 R13.1 3703.68,2960.63 R19.1
  Top Layer w25: C5.1@2180.04,3140.69 2180.04,3166.36 2193.13,3179.45 VR1.3
  Top Layer w30: VR1.3 2309.53,3175.75 2333.15,3175.75 2421.65,3087.24 2761.38,3087.24 2770,3078.62 C4.1 ; L1.1 2790,2999.57 C4.1@2770,3019.57 ; C4.1@2770,3019.57 C4.1 ; C4.1@2770,3019.57 C4.1
pads on no net: J1.8 J1.9 J1.10 J1.12 J1.13 J1.14 P1.3 P1.9 P1.10 U1.2 U1.3 U1.4 U1.5 U1.6 U1.8 U1.9 U1.10 U1.11 U1.17 U1.24 U1.25 U1.30 U1.33 U1.34 U1.35 U1.36 U1.37 U1.38 U1.50 U1.51 U1.52 U1.53 U1.54 U1.55 U1.56 U1.57 U1.61 U1.62 U2.1 U2.2 U2.3

## Polygon pours and split planes (outlines as drawn)
GND on Bottom Layer "NONET_L02_P000" (hatched Horizontal grid 20 track 8, remove dead copper, shelved, pour order 0): 1010,4990 1010,2590 4956.34,2590 4923.66,4990

## Keep-outs
Keep-Out Layer:
  lines w10: 990,5020 4970,5020 4970,2590 990,2590 990,5020 ; 990,5020 990,5020

## Silkscreen, mask and mechanical layers (free items; w line width, h text height)
Mechanical 15:
  the board outline again, w10

## Text inside footprints (layer, text, board x,y; h text height)
P1: Bottom Overlay "2" at 1170,4165.63 h50 r270; Bottom Overlay "1" at 1070,4185.63 h50 r270; Bottom Overlay "9" at 1070,4725.63 h50 r270; Bottom Overlay "10" at 1170,4725.63 h50 r270